# Altium PCB Therm_Expand_GND.PcbDoc
Units mil, origin at the board's own origin, x right, y up, seen from the top; angles counter-clockwise.
Board outline 3325 x 2597 mil, 2 copper layers (Top Layer, Bottom Layer); 44 components, 35 nets, 223 pads, 44 vias.
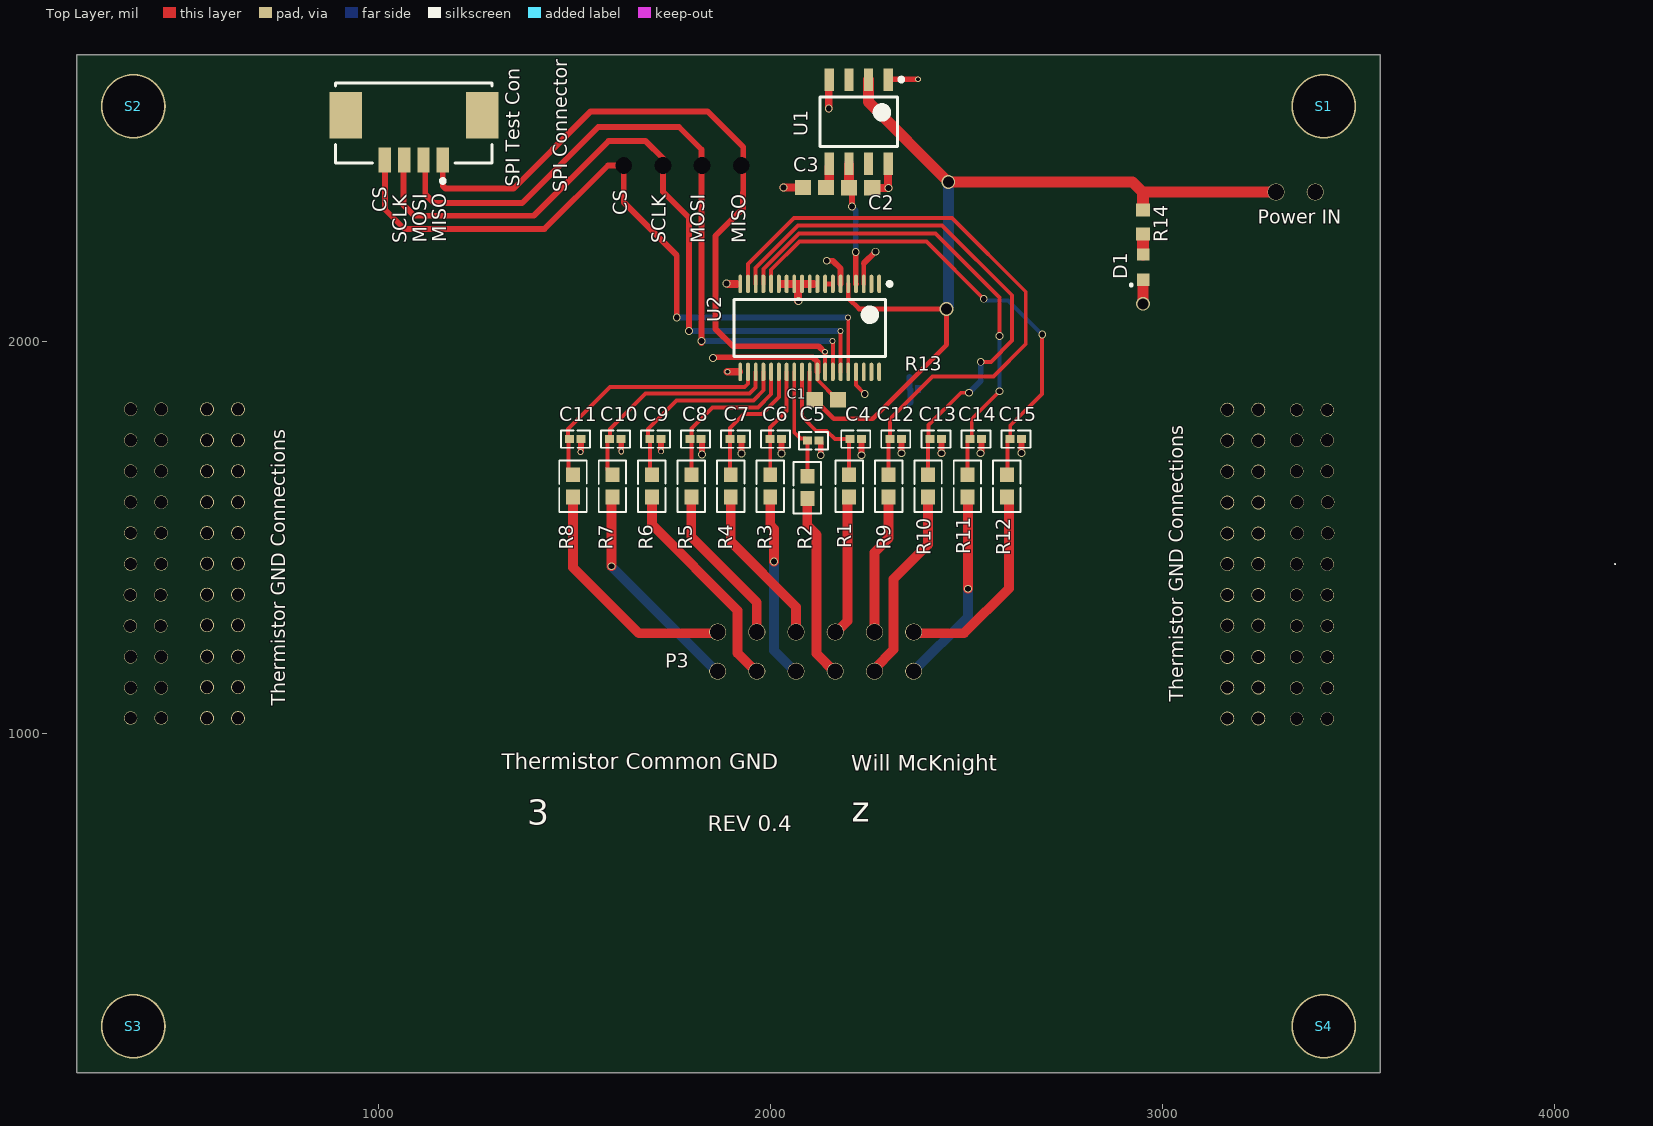
[diagram p0: Top Layer view]
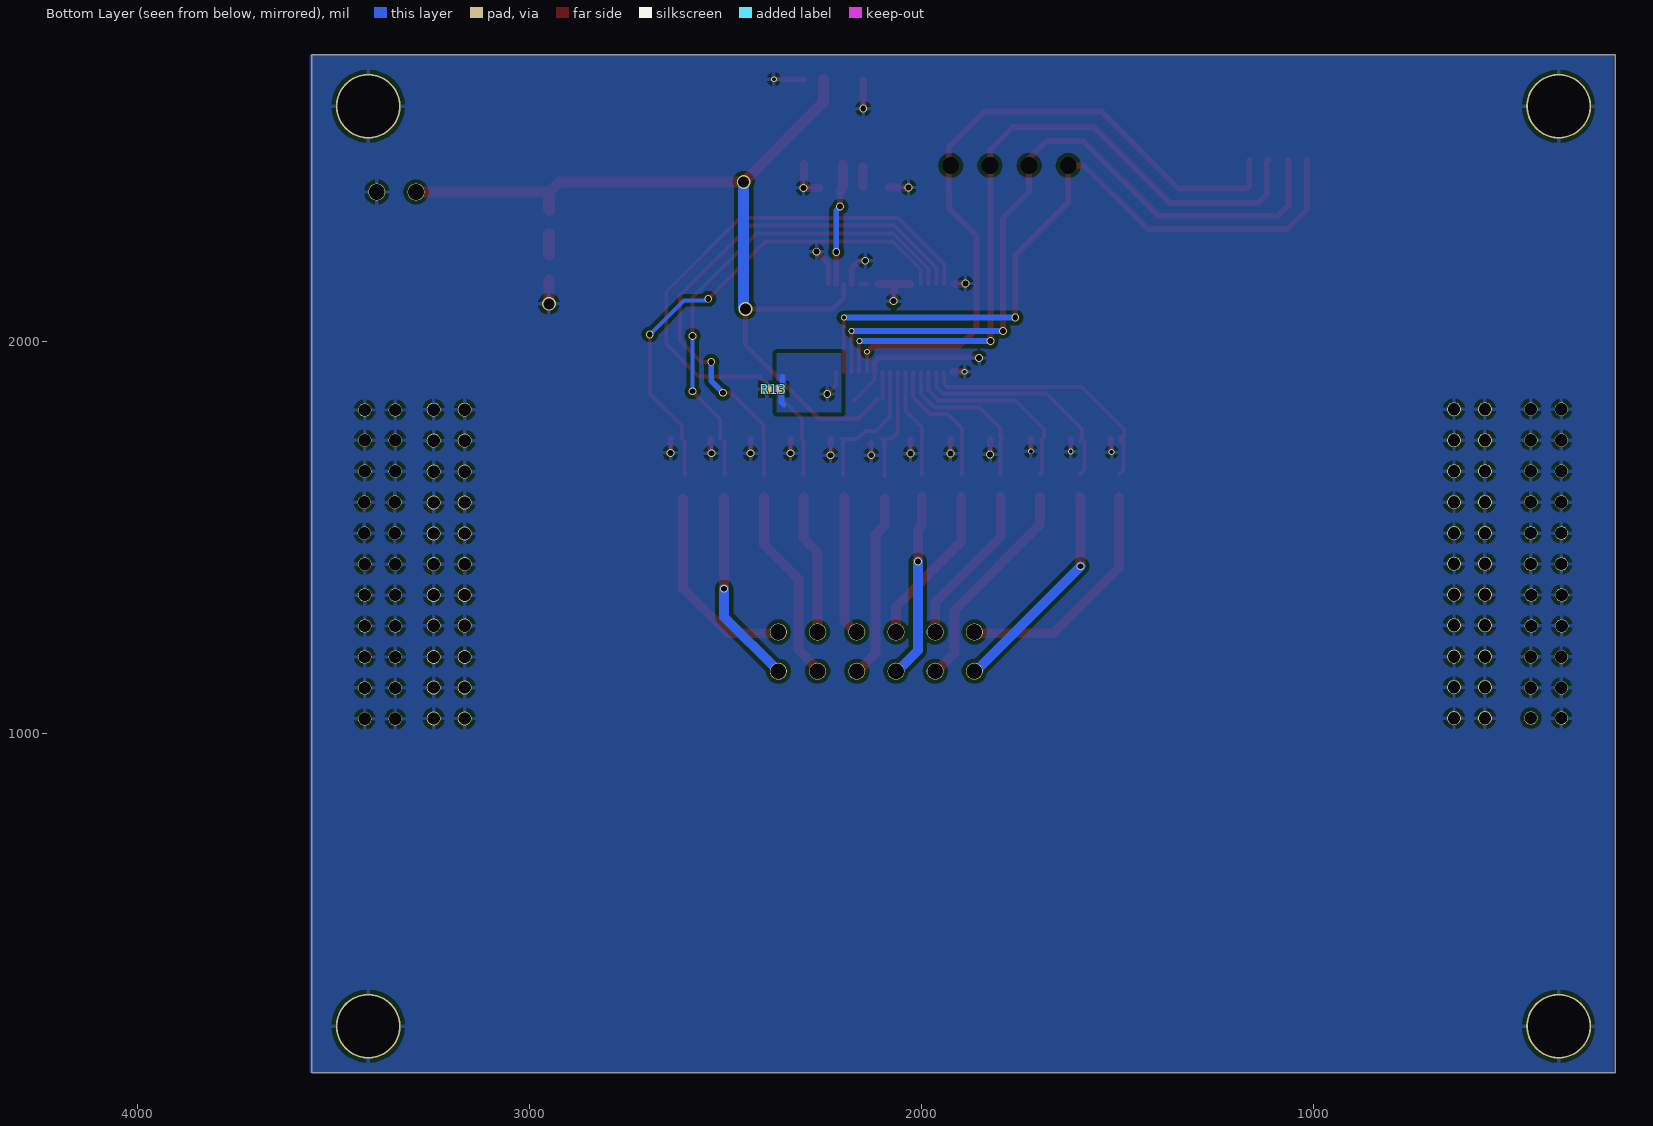
[diagram p1: Bottom Layer view, seen from below]
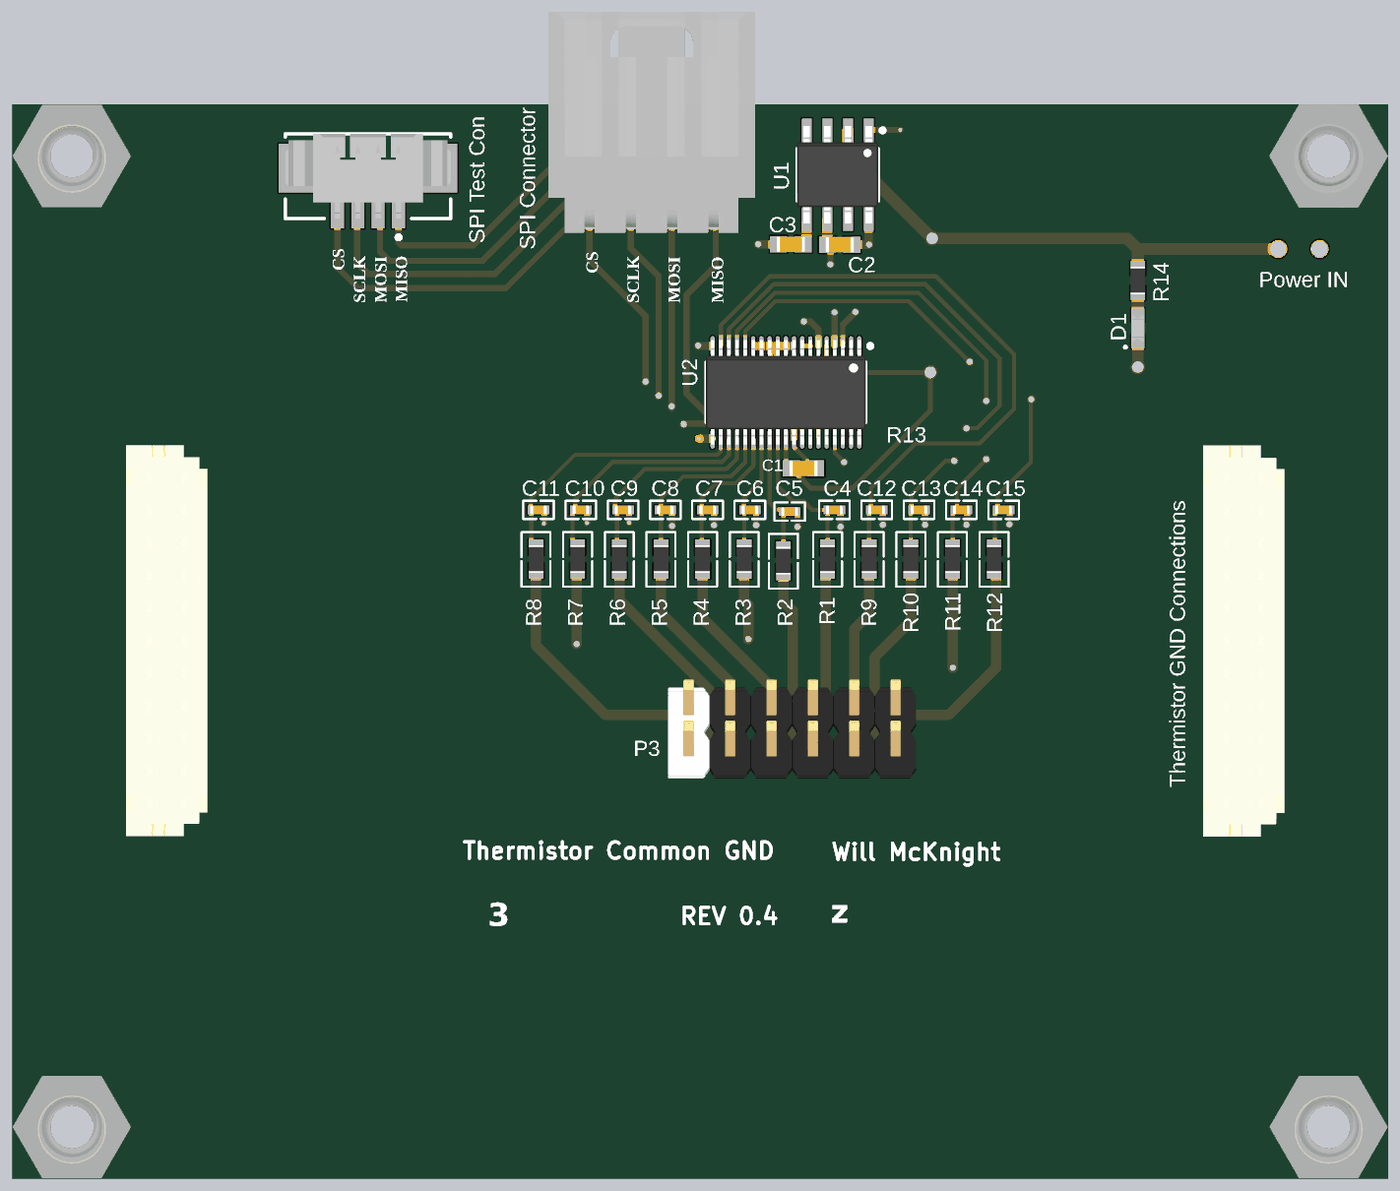
[diagram p2: 3D render of the assembled board from above, using the file's embedded part models]

## Layer stack, top to bottom
Top Solder: solder mask 0.4, Solder Resist, Dk 3.5
Top Layer: signal copper 1.4
Dielectric 1: dielectric 12.6, FR-4, Dk 4.8
Bottom Layer: signal copper 1.4
Bottom Solder: solder mask 0.4, Solder Resist, Dk 3.5

## Board outline
230,134 3555,134 3555,2731 230,2731

## Design rules (kind name [scope] priority, off if disabled: settings)
Clearance [All] p1: gap=10 ignorepadtopadclearanceinfootprint=TRUE except(0: Arc-Hole Track-Hole SMDPad-Hole THPad-Hole Via-Hole Fill-Hole Poly-Hole Region-Hole Text-Hole; 2: Track-Fill SMDPad-Fill THPad-Fill; 5: Arc-Arc Arc-Track Arc-SMDPad Track-Track Track-SMDPad Track-Via SMDPad-SMDPad Via-Via)
PolygonConnect PolygonConnect_1 [All] p1: connectstyle=Relief reliefconductorwidth=10 reliefentries=4 polygonreliefangle="90 Angle" airgapwidth=10
PolygonConnect [All] p2: thpad.connectstyle=Relief thpad.reliefconductorwidth=5 thpad.reliefentries=4 thpad.polygonreliefangle="45 Angle" thpad.airgapwidth=7 smdpad.connectstyle=Relief smdpad.reliefconductorwidth=10 smdpad.reliefentries=4 smdpad.polygonreliefangle="90 Angle" smdpad.airgapwidth=10 via.connectstyle=Relief via.reliefconductorwidth=10 via.reliefentries=4 via.polygonreliefangle="90 Angle" via.airgapwidth=10
RoutingVias [All] p1: holewidth=10 width=15 viastyle="Through Hole" minholewidth=10 minwidth=10 maxholewidth=28 maxwidth=50
ShortCircuit [All] p1 off: allowed=FALSE
SolderMaskExpansion [All] p1: expansion=4
UnRoutedNet [All] p1: checkbadconnections=TRUE
Width [All] p1: maxlimit=50 minlimit=6 preferedwidth=10 minimp=50.000000 maximp=50.000000 favimp=50.000000
28 further rules are at their usual default settings.

## Classes and differential pairs
component class 4X_22_GND_Pin_Connector: S1 S2 S3 S4
component class GND_PCB_Data_Conversion: "3.3V VREF IN" C1 C2 C3 C4 C5 C6 C7 C8 C9 C10 C11 C12 C13 C14 C15 P3 R1 R2 R3 R4 R5 R6 R7 R8 R9 R10 R11 R12 R13 U1

## Components (designator, comment, footprint, x,y, rotation, side; value= is the part's Value field where it differs from the comment)
C1 "0.1uF" "0.1uF Bypass Capacitor" 2142,1851 r180 top
C2 "0.1uF" "0.1uF Bypass Capacitor" 2229.61,2391.75 r180 top
C3 "0.1uF" "0.1uF Bypass Capacitor" 2111.61,2392.75 r180 top
C4 "150PF Charge Res Caps" "150PF Cap Charge Resevoir" 2216.89,1750.75 r180 top
C5 "150PF Charge Res Caps" "150PF Cap Charge Resevoir" 2108.71,1746.75 r180 top
C6 "150PF Charge Res Caps" "150PF Cap Charge Resevoir" 2012.52,1750.75 r180 top
C7 "150PF Charge Res Caps" "150PF Cap Charge Resevoir" 1910.34,1750.75 r180 top
C8 "150PF Charge Res Caps" "150PF Cap Charge Resevoir" 1808.16,1750.75 r180 top
C9 "150PF Charge Res Caps" "150PF Cap Charge Resevoir" 1705.98,1750.75 r180 top
C10 "150PF Charge Res Caps" "150PF Cap Charge Resevoir" 1603.8,1750.75 r180 top
C11 "150PF Charge Res Caps" "150PF Cap Charge Resevoir" 1501.61,1750.75 r180 top
C12 "150PF Charge Res Caps" "150PF Cap Charge Resevoir" 2319.07,1750.75 r180 top
C13 "150PF Charge Res Caps" "150PF Cap Charge Resevoir" 2421.25,1750.75 r180 top
C14 "150PF Charge Res Caps" "150PF Cap Charge Resevoir" 2523.43,1750.75 r180 top
C15 "150PF Charge Res Caps" "150PF Cap Charge Resevoir" 2625.61,1750.75 r180 top
D1 "LED" Green_SMD_LED 2886,1811 r90 top
P2 "22-Pin-Connector" "22-Pin Conenctor" -10142,-11980 r270 top
P3 "12 POS ADC Header" "12 POS Dual Header" 2364.61,1258.75 r180 top
P5 "22-Pin-Connector-Recepticle" "22 POS Connector Recepticle" 641,1039 r90 top
"Power IN" "2 Pos Power Header without 3D body" "2 Pos Power Header - duplicate" 3389.11,2381.29 r180 top (schematic designator P8)
R1 "75 Ohm Charge Resevoir Resistor" Chip2PinSM127P600-8N 2200.07,1631.75 r90 top
R2 "75 Ohm Charge Resevoir Resistor" Chip2PinSM127P600-8N 2093.43,1627.75 r90 top
R3 "75 Ohm Charge Resevoir Resistor" Chip2PinSM127P600-8N 1998.8,1631.75 r90 top
R4 "75 Ohm Charge Resevoir Resistor" Chip2PinSM127P600-8N 1898.16,1631.75 r90 top
R5 "75 Ohm Charge Resevoir Resistor" Chip2PinSM127P600-8N 1797.52,1631.75 r90 top
R6 "75 Ohm Charge Resevoir Resistor" Chip2PinSM127P600-8N 1696.89,1631.75 r90 top
R7 "75 Ohm Charge Resevoir Resistor" Chip2PinSM127P600-8N 1596.25,1631.75 r90 top
R8 "75 Ohm Charge Resevoir Resistor" Chip2PinSM127P600-8N 1495.61,1631.75 r90 top
R9 "75 Ohm Charge Resevoir Resistor" Chip2PinSM127P600-8N 2300.71,1631.75 r90 top
R10 "75 Ohm Charge Resevoir Resistor" Chip2PinSM127P600-8N 2401.34,1631.75 r90 top
R11 "75 Ohm Charge Resevoir Resistor" Chip2PinSM127P600-8N 2501.98,1631.75 r90 top
R12 "75 Ohm Charge Resevoir Resistor" Chip2PinSM127P600-8N 2602.61,1631.75 r90 top
R13 "0 Ohm Resistor" "0 OHM RESISTOR" 2394,1878 r180 top
R14 "Green" Green_LED_Resistor_90.9 2950,2305 r270 top
S1 "#6-32 Hex Standoff" "#6-32 GND Standoff" 3413,2602 r90 top
S2 "#6-32 Hex Standoff" "#6-32 GND Standoff" 376,2602 r90 top
S3 "#6-32 Hex Standoff" "#6-32 GND Standoff" 376,255 r90 top
S4 "#6-32 Hex Standoff" "#6-32 GND Standoff" 3413,255 r90 top
"SPI Connector" "2.54MM MUX SEL CON" "4POS 2.54MM HEADER MUX SEL" 1624,2524 r0 top
"SPI Test Con" "SPI Tets Connector" "SPI Testing Connector" 1090.61,2518.75 r180 top
"Thermistor GND Connections" "22-Pin-Connector" "22-Pin Conenctor" 13929,14844.19 r90 top (schematic designator P1)
"Thermistor GND Connections" "22-Pin-Connector-Recepticle" "22 POS Connector Recepticle" 3244,1038 r90 top (schematic designator P4)
U1 "8Pin_ADC_REF_V" SOIC127P600X175-8N 2224.61,2560.75 r270 top
U2 "12 Channel SAR ADC" "12 Channel SAR ADC" 2099.5,2034.55 r270 top locked

## Footprints (in the part's own frame and the unit in brackets; to place one, negate y for a bottom-side part, rotate by r counter-clockwise, add the part's x,y. Pads: shape width x height; smd on the part's side, far side on the other; paste and mask are expansions set on the pad)
"0 OHM RESISTOR" [mm]
  rect 0.6x0.6 smd far side: 1(0,0) 2(0.914,0)
  Bottom Layer region: 0.254,-0.279 0.66,-0.279 0.66,0.254 0.254,0.254
"0.1uF Bypass Capacitor" [mm] "Chip Capacitor, 2-Leads, Body 1.60x0.80mm, IPC Medium Density"
  rect 1.05x1 smd: 1(-0.75,0) 2(0.75,0)
  body extent -0.87,-0.48 0.87,0.48, height 0.9
"2 Pos Power Header - duplicate" [mm] "Without 3D body,"
  round 1.1 hole 1.02: 1(0,0) 2(2.54,0)
"4POS 2.54MM HEADER MUX SEL" [mm]
  round 1 hole 1.09: 1(0.025,-1.905) 2(2.565,-1.905) 3(5.105,-1.905) 4(7.645,-1.905)
  round 0.8 hole 1.09: 4(7.645,-1.905)
  body extent -2.51,-2.64 10.19,10.95, height 7.06
"12 Channel SAR ADC" [mm] "TSSOP, 38-Leads, Body 9.70x4.40mm, Pitch 0.50mm, IPC High Density"
  oval 1.2x0.25 smd: 1(-2.85,4.5) 2(-2.85,4) 3(-2.85,3.5) 4(-2.85,3) 5(-2.85,2.5) 6(-2.85,2) 7(-2.85,1.5) 8(-2.85,1) 9(-2.85,0.5) 10(-2.85,0) 11(-2.85,-0.5) 12(-2.85,-1) 13(-2.85,-1.5) 14(-2.85,-2) 15(-2.85,-2.5) 16(-2.85,-3) 17(-2.85,-3.5) 18(-2.85,-4) 19(-2.85,-4.5) 20(2.85,-4.5) 21(2.85,-4) 22(2.85,-3.5) 23(2.85,-3) 24(2.85,-2.5) 25(2.85,-2) 26(2.85,-1.5) 27(2.85,-1) 28(2.85,-0.5) 29(2.85,0) 30(2.85,0.5) 31(2.85,1) 32(2.85,1.5) 33(2.85,2) 34(2.85,2.5) 35(2.85,3) 36(2.85,3.5) 37(2.85,4) 38(2.85,4.5)
  silkscreen extent -2.97,-4.9 1.85,5.3, body extent -3.2,-4.9 3.2,4.9, height 1.2
"12 POS Dual Header" [mm] "Board to Board ADC Channel Header"
  round 1.1 hole 1.02: 1(0,0) 2(0,2.54) 3(2.54,2.54) 4(2.54,0) 5(5.08,0) 6(5.08,2.54) 7(7.62,2.54) 8(7.62,0) 9(10.16,0) 10(10.16,2.54) 11(12.7,2.54) 12(12.7,0)
  body extent -1.27,-3.18 13.97,4.7, height 20.46
"22 POS Connector Recepticle" [mm]
  round 0.9 hole 0.8: 1(0,0) 2(0,2.007) 3(2.007,2.007) 4(2.007,0) 5(3.988,0) 6(3.988,2.007) 7(6.02,2.007) 8(6.02,0) 9(8.001,0) 10(8.001,2.007) 11(10.008,2.007) 12(10.008,0) 13(11.989,0) 14(11.989,2.007) 15(13.995,2.007) 16(13.995,0) 17(16.002,0) 18(16.002,2.007) 19(18.009,2.007) 20(18.009,0) 21(20.015,0) 22(20.015,2.007)
  body extent -1.95,-1.53 22.05,3.47, height 5.8
"22-Pin Conenctor" [mil]
  round 34 hole 31.5: 1(-13017,13484) 2(-13017,13562) 3(-13096,13484) 4(-13096,13562) 5(-13175,13484) 6(-13175,13562) 7(-13254,13484) 8(-13254,13562) 9(-13333,13484) 10(-13333,13562) 11(-13412,13484) 12(-13412,13562) 13(-13491,13485) 14(-13491,13563) 15(-13570,13485) 16(-13570,13563) 17(-13649,13484) 18(-13649,13562) 19(-13728,13484) 20(-13728,13562) 22(-13805,13562) 51(-13805,13484)
  body extent -13883,13472 -12939,13866, height 199
"150PF Cap Charge Resevoir" [mm] "Charge Res Caps for ADC Input Channels"
  rect 0.58x0.52 smd: 1(-0.37,0) 2(0.37,0)
  silkscreen extent -0.94,-0.56 0.94,0.56, body extent -0.53,-0.28 0.53,0.28, height 0.55
"#6-32 GND Standoff" [mm] "Hex standoff for Thermistor GND PCB"
  round 4.2 hole 4: 1(-0.051,0.051)
  body extent -3.07,-3.61 3.28,3.71, height 9.53
Chip2PinSM127P600-8N [mm] "75 Ohm Charge Resevoir Resistor"
  rect 0.95x0.9 smd: 1(-0.725,0) 2(0.725,0)
  silkscreen extent -1.7,-0.89 1.65,0.89, body extent -0.85,-0.45 0.85,0.45, height 0.55
Green_LED_Resistor_90.9 [mm]
  rect 0.85x0.9 smd: 1(-0.775,0) 2(0.775,0)
  body extent -0.85,-0.45 0.85,0.45, height 0.55
Green_SMD_LED [mil]
  rect 31.5x31.5 smd: 1(346,-64) 2(411,-64)
  silkscreen extent 332,-35 334,-33, body extent 346,-79 410,-48, height 28
SOIC127P600X175-8N [mm] "SOIC, 8-Leads, Body 4.90x3.90mm, Pitch 1.27mm, IPC Medium Density"
  rect 1.45x0.6 smd: 1(-2.725,1.905) 2(-2.725,0.635) 3(-2.725,-0.635) 4(-2.725,-1.905) 5(2.725,-1.905) 6(2.725,-0.635) 7(2.725,0.635) 8(2.725,1.905)
  silkscreen extent -2.85,-2.5 1.6,2.88, body extent -3,-2.5 3,2.5, height 1.75
"SPI Testing Connector" [mm]
  rect 0.8x1.6 smd: 1(-1.85,1.425) 2(-0.6,1.425) 3(0.65,1.425) 4(1.9,1.425)
  rect 2.1x3 smd: MP1(-4.4,-1.475) MP2(4.45,-1.475)
  silkscreen extent -5.05,-3.58 5.1,2.9, body extent -5.05,-3.58 5.1,1.62, height 3.4

## Part data
C1 C2 C3: library part "0.1uF Cap", "0.1uF Bypass Cap", Case/Package=0603, Case Code (Metric)=1608, Dielectric=X7R, Dielectric Material=Ceramic, Manufacturer=KEMET, Manufacturer Part Number=C0603C104K9RACTU, Max Operating Temperature=125°C, Min Operating Temperature=-55°C, Package Quantity=4000, Supplier Part Number 1=399-15351-1-ND, Tolerance=10%, Voltage Rating=6.3V, Case Code (Imperial)=0603, ComponentLink1Description=https://datasheet.ciiva.com/13371/kem-c1002-x7r-smd-357932-13371879.pdf?src-supplier=Mouser, ComponentLink1URL=https://datasheet.ciiva.com/13371/kem-c1002-x7r-smd-357932-13371879.pdf?src-supplier=Mouser, Dissipation Factor=5%, Height=0.8mm, Length=1.6mm, Mount="Surface Mount", Packaging="Tape and Reel", Pricing 1="1=0.19000, 10=0.13800, 100=0.06480, 500=0.04546, 1000=0.03763 (USD)", RoHS=Yes, Stock 1=758, Supplier 1=Digi-Key, Termination=SMD/SMT, Thickness=0.034inch, Voltage Rating (DC)=6.3V, Width=0.8mm
C4 C5 C6 C7 C8 C9 C10 C11 C12 C13 C14 C15: "Charge Res Caps for ADC input channels", Capacitance=150pF, Case/Package=0402, Dielectric=C0G, Dielectric Material=Ceramic, Manufacturer=KEMET, Manufacturer Part Number=C0402C151J3GACTU, Max Operating Temperature=125°C, Min Operating Temperature=-55°C, Package Quantity=10000, Supplier Part Number 1=80-C0402C151J3G, Tolerance=5%, Voltage Rating=25V, ComponentLink1Description=http://components.arrow.com/part/dataview/46126249S9911696N7429?src-supplier=Arrow, ComponentLink1URL=http://components.arrow.com/part/dataview/46126249S9911696N7429?src-supplier=Arrow, ComponentLink2Description=http://www.kemet.com/docfinder?Partnumber=C0402C151J3GACTU&src-supplier=Digi-Key, ComponentLink2URL=http://www.kemet.com/docfinder?Partnumber=C0402C151J3GACTU&src-supplier=Digi-Key, Depth=0.5mm, Lead Free="Lead Free", Length=0.039inch, Mount="Surface Mount", Packaging="Tape and Reel", Pricing 1="1=0.39000, 10=0.23200, 50=0.23200, 100=0.14100, 500=0.12800, 1000=0.11500, 2000=0.09600, 10000=0.07600 (USD)", Radiation Hardening=No, RoHS=Yes, Stock 1=1976, Supplier 1=Mouser, Thickness=0.022inch, Voltage Rating (DC)=25V, Width=0.02inch
D1: library part GREEN_LED, Case/Package=0603, Case Code (Metric)=1608, Color=Green, Forward Current=20mA, Forward Voltage=2V, Lens Color=Colorless,Clear, Manufacturer=Dialight, Manufacturer Part Number=5988070107F, Max Operating Temperature=100°C, Min Operating Temperature=-30°C, Package Quantity=4000, Power Dissipation=60mW, Reverse Voltage=5V, Supplier Part Number 1=350-2035-1-ND, Case Code (Imperial)=0603, ComponentLink1Description=http://www.mouser.com/ds/2/109/SMT_selector_guide-267443.pdf?src-supplier=Mouser, ComponentLink1URL=http://www.mouser.com/ds/2/109/SMT_selector_guide-267443.pdf?src-supplier=Mouser, ComponentLink2Description=http://uk.rs-online.com/webdocs/0ae2/0900766b80ae2975.pdf?src-supplier=RSComponents, ComponentLink2URL=http://uk.rs-online.com/webdocs/0ae2/0900766b80ae2975.pdf?src-supplier=RSComponents, ComponentLink3Description=http://www.farnell.com/datasheets/1720200.pdf?src-supplier=Element14, ComponentLink3URL=http://www.farnell.com/datasheets/1720200.pdf?src-supplier=Element14, ComponentLink4Description=https://media.digikey.com/pdf/Data%20Sheets/Dialight%20PDFs/598_Series_0603_Pkg.pdf?src-supplier=Digi-Key, ComponentLink4URL=https://media.digikey.com/pdf/Data%20Sheets/Dialight%20PDFs/598_Series_0603_Pkg.pdf?src-supplier=Digi-Key, ComponentLink5Description=http://www.farnell.com/datasheets/1484480.pdf?src-supplier=Element14, ComponentLink5URL=http://www.farnell.com/datasheets/1484480.pdf?src-supplier=Element14, ComponentLink6Description=https://www.alliedelec.com/m/d/745256ca487aea7b70ea31e2d673d5bb.pdf?src-supplier=Allied+Electronics, ComponentLink6URL=https://www.alliedelec.com/m/d/745256ca487aea7b70ea31e2d673d5bb.pdf?src-supplier=Allied+Electronics, ComponentLink7Description=http://www.onlinecomponents.com/productFiles/mf-DIA/mdei5980603.pdf?src-supplier=Onlinecomponents.com, ComponentLink7URL=http://www.onlinecomponents.com/productFiles/mf-DIA/mdei5980603.pdf?src-supplier=Onlinecomponents.com, ComponentLink8Description=https://www.verical.com/server-webapp/html/getDatasheet?partID=146438&src-supplier=Verical, ComponentLink8URL=https://www.verical.com/server-webapp/html/getDatasheet?partID=146438&src-supplier=Verical, ComponentLink9Description=http://www.dialight.com/Assets/Brochures_And_Catalogs/Indication/SMT_selector_guide.pdf?src-supplier=Future+Electronics, ComponentLink9URL=http://www.dialight.com/Assets/Brochures_And_Catalogs/Indication/SMT_selector_guide.pdf?src-supplier=Future+Electronics, Depth=0.8mm, Dominant Wavelength=568nm, Height=0.7mm, Illumination Color=Green, Lead Free="Lead Free", Length=1.6mm, Lens Size=0.8mm, Lens Style=Flat,Rectangular,Diffused,Colorless,Clear, Lens Transparency=Clear, Luminous Intensity=20mcd, Mount="Surface Mount", Number of Elements=1, Number of LEDs=1, Number of Pins=2, Packaging="Tape and Reel", Pricing 1="1=0.46, 10=0.33, 25=0.2528, 100=0.1648, 250=0.1209, 500=0.1026, 1000=0.0843 (USD)", Radiation Hardening=No, REACH SVHC="No SVHC", Stock 1=228546, Supplier 1=Digi-Key, Test Current=20mA, Viewing Angle=140°, Wavelength=570nm, Width=0.8mm
P2 "Thermistor GND Connections": Color=Black, Contact Resistance=30mR, Current Rating=2A, Manufacturer=Hirose, Manufacturer Part Number=DF11-22DP-2DS(24), Max Operating Temperature=85°C, Min Operating Temperature=-30°C, Package Quantity=20, Supplier Part Number 1=H10253-ND, Voltage Rating=250V, ComponentLink1Description=http://docs-usa.electrocomponents.com/techlib:/itc_doclist_US.htm?stockno=6888963&src-supplier=Allied+Electronics, ComponentLink1URL=http://docs-usa.electrocomponents.com/techlib:/itc_doclist_US.htm?stockno=6888963&src-supplier=Allied+Electronics, ComponentLink2Description=https://www.verical.com/server-webapp/html/getDatasheet?partID=456315&src-supplier=Verical, ComponentLink2URL=https://www.verical.com/server-webapp/html/getDatasheet?partID=456315&src-supplier=Verical, ComponentLink3Description=http://www.hirose.co.jp/cataloge_hp/en_DF11_20130411.pdf?src-supplier=Future+Electronics, ComponentLink3URL=http://www.hirose.co.jp/cataloge_hp/en_DF11_20130411.pdf?src-supplier=Future+Electronics, ComponentLink4Description=http://www.farnell.com/datasheets/91550.pdf?src-supplier=Element14, ComponentLink4URL=http://www.farnell.com/datasheets/91550.pdf?src-supplier=Element14, ComponentLink5Description=http://www.mouser.com/ds/2/185/DF11_catalog-1064296.pdf?src-supplier=Mouser, ComponentLink5URL=http://www.mouser.com/ds/2/185/DF11_catalog-1064296.pdf?src-supplier=Mouser, ComponentLink6Description=http://documents.rs-components.com/techlib://itc_doclist_GB.htm?stockno=6056598&src-supplier=RSComponents, ComponentLink6URL=http://documents.rs-components.com/techlib://itc_doclist_GB.htm?stockno=6056598&src-supplier=RSComponents, Connector Type="Male Pin", Contact Material="Brass,Copper Alloy,Tin", Contact Mating Length=0.118inch, Contact Plating=Tin, Depth=10mm, Fastening Type=Detent, Gender=Male, Height=5mm, Housing Color=Black, Housing Material=Polyamide, Lead Free="Lead Free", Length=24mm, Max Current Rating=2A, Mount="Through Hole", Number of Contacts=22, Number of Positions=22, Number of Rows=2, Orientation="Right Angle", Packaging=Rail/Tube, Pitch=2mm, Pricing 1="1=1.19, 20=1.0455, 100=0.902, 500=0.738, 1000=0.656 (USD)", Radiation Hardening=No, Row Spacing=0.079inch, Stock 1=536, Supplier 1=Digi-Key, System=Connector, Termination=Solder
P3: "Interboard connector for thermistors connecting to ADC", Color=Black, Manufacturer=3M, Manufacturer Part Number=929715-06-06-EU, Package Quantity=500, Supplier Part Number 1=3M156375-12-ND, ComponentLink1Description=http://www.mouser.com/ds/2/1/ts0769-35914.pdf?src-supplier=Mouser, ComponentLink1URL=http://www.mouser.com/ds/2/1/ts0769-35914.pdf?src-supplier=Mouser, ComponentLink2Description=http://components.arrow.com/part/dataview/42715320S8912076N3321?src-supplier=Arrow, ComponentLink2URL=http://components.arrow.com/part/dataview/42715320S8912076N3321?src-supplier=Arrow, ComponentLink3Description=http://multimedia.3m.com/mws/mediawebserver?66666UuZjcFSLXTtmXME5x46EVuQEcuZgVs6EVs6E666666--?src-supplier=Digi-Key, ComponentLink3URL=http://multimedia.3m.com/mws/mediawebserver?66666UuZjcFSLXTtmXME5x46EVuQEcuZgVs6EVs6E666666--?src-supplier=Digi-Key, Connector Type="Male Pin", Contact Mating Length=0.318inch, Contact Plating=Gold, Gender=Male, Mount="Through Hole", Number of Positions=12, Number of Rows=2, Packaging=Bulk, Pitch=0.1inch, Pricing 1="1=1.86000, 10=1.69000, 25=1.58600, 50=1.51720, 100=1.44820, 250=1.31024, 500=1.20680 (USD)", RoHS=Yes, Row Spacing=0.1inch, Stock 1=0, Supplier 1=Digi-Key, Termination=Solder
P5 "Thermistor GND Connections": Color=Black, Contact Resistance=30mR, Current Rating=2A, Flammability Rating="UL94 V-0", Insulation Resistance=1GR, Manufacturer=Hirose, Manufacturer Part Number=DF11-22DS-2DSA(05), Package Quantity=100, Supplier Part Number 1=H10177-ND, Voltage Rating (AC)=30V, ComponentLink1Description=https://datasheet.ciiva.com/11752/0900766b80d975f3-11752361.pdf?src-supplier=RSComponents, ComponentLink1URL=https://datasheet.ciiva.com/11752/0900766b80d975f3-11752361.pdf?src-supplier=RSComponents, ComponentLink2Description=https://datasheet.ciiva.com/14122/df11serie-eng-tds-14122182.pdf?src-supplier=Distrelec, ComponentLink2URL=https://datasheet.ciiva.com/14122/df11serie-eng-tds-14122182.pdf?src-supplier=Distrelec, ComponentLink3Description=https://datasheet.ciiva.com/5155/en-df11-20130411-258217-5155093.pdf?src-supplier=Mouser, ComponentLink3URL=https://datasheet.ciiva.com/5155/en-df11-20130411-258217-5155093.pdf?src-supplier=Mouser, Connector Type=Receptacle, Contact Gender=Female, Contact Material=Copper, Contact Plating=Tin, Gender=Receptacle, Housing Color=Black, Housing Material=Polyamide, Lead Free="Lead Free", Lead Pitch=2mm, Mating Cycles=30, Mount="Through Hole", Number of Contacts=22, Number of Positions=22, Number of Rows=2, Orientation=Straight, Packaging=Bulk, Pitch=2mm, Pricing 1="1=1.40000, 10=1.27400, 100=1.09200, 500=0.91000, 1000=0.78000 (USD)", REACH SVHC="No SVHC", RoHS=Yes, Row Spacing=0.079inch, Stock 1=843, Supplier 1=Digi-Key, System=Connector, Termination="Through Hole"
"Power IN": "No supplier part for this schematic symbol, only here to create board to board holes for the power header"
R1 R2 R3 R4 R5 R6 R7 R8 R9 R10 R11 R12: Case/Package=0603, Case Code (Metric)=1608, Manufacturer=Rohm, Manufacturer Part Number=KTR03EZPF75R0, Max Operating Temperature=155°C, Max Power Dissipation=100mW, Min Operating Temperature=-55°C, Package Quantity=1, Resistance=75R, Supplier Part Number 1=RHM75AYCT-ND, Temperature Coefficient=100ppm/°C, Tolerance=1%, Case Code (Imperial)=0603, ComponentLink1Description=https://datasheet.ciiva.com/14930/ktr-14930245.pdf?src-supplier=Digi-Key, ComponentLink1URL=https://datasheet.ciiva.com/14930/ktr-14930245.pdf?src-supplier=Digi-Key, ComponentLink2Description=https://datasheet.ciiva.com/14924/ktr-14924923.pdf?src-supplier=Digi-Key, ComponentLink2URL=https://datasheet.ciiva.com/14924/ktr-14924923.pdf?src-supplier=Digi-Key, ComponentLink3Description=https://datasheet.ciiva.com/14928/ktr-14928475.pdf?src-supplier=Digi-Key, ComponentLink3URL=https://datasheet.ciiva.com/14928/ktr-14928475.pdf?src-supplier=Digi-Key, Composition="Thick Film", Features="Automotive AEC-Q200", Height=0.022inch, Length=0.063inch, Number of Terminations=2, Packaging="Cut Tape", Pricing 1="1=0.15000, 10=0.13500, 100=0.05200, 1000=0.02287, 2500=0.01975 (USD)", RoHS=Yes, Stock 1=9052, Supplier 1=Digi-Key, Width=0.031inch
R13: "0 Ohm Resistor for connecting polygon pours"
R14: library part Green_LED_Res, Case/Package=0201, Case Code (Metric)=0603, Manufacturer=Panasonic, Manufacturer Part Number=ERJ-1GNF90R9C, Max Operating Temperature=125°C, Max Power Dissipation=50mW, Min Operating Temperature=-55°C, Package Quantity=15000, Resistance=90.9R, Supplier Part Number 1=311-90.9HRCT-ND, Temperature Coefficient=200ppm/°C, Tolerance=1%, Voltage Rating=25V, Voltage Rating (DC)=50V, Case Code (Imperial)=0201, ComponentLink1Description=https://datasheet.ciiva.com/15189/getdatasheetpartid-326528-15189836.pdf?src-supplier=Verical, ComponentLink1URL=https://datasheet.ciiva.com/15189/getdatasheetpartid-326528-15189836.pdf?src-supplier=Verical, ComponentLink2Description=https://datasheet.ciiva.com/12558/rc0603-272842-12558285.pdf?src-supplier=Mouser, ComponentLink2URL=https://datasheet.ciiva.com/12558/rc0603-272842-12558285.pdf?src-supplier=Mouser, Composition="Thick Film", Contact Plating=Tin,Matte, Depth=0.8mm, Height=0.01inch, Lead Free="Lead Free", Length=0.024inch, Military Standard=Not, Mount="Surface Mount", Number of Terminations=2, Packaging="Tape and Reel", Power Rating=50mW, Pricing 1="1=0.10000, 10=0.02400, 100=0.00970, 1000=0.00437, 2500=0.00379 (USD)", Radiation Hardening=No, RoHS=Yes, Stock 1=401780, Supplier 1=Digi-Key, Termination=SMD/SMT, Width=0.3mm
S1 S2 S3 S4: "Hex standoff for Thermistor GND Board", Case/Package=Aluminum, Manufacturer=RAF, Manufacturer Part Number=2104-632-AL, Supplier Part Number 1=1772-1401-ND, ComponentLink1Description=https://datasheet.ciiva.com/18425/70006493-18425850.pdf?src-supplier=Allied+Electronics, ComponentLink1URL=https://datasheet.ciiva.com/18425/70006493-18425850.pdf?src-supplier=Allied+Electronics, ComponentLink2Description=https://datasheet.ciiva.com/30059/2101-1032-b-5-30059595.pdf?src-supplier=Onlinecomponents.com, ComponentLink2URL=https://datasheet.ciiva.com/30059/2101-1032-b-5-30059595.pdf?src-supplier=Onlinecomponents.com, Gender="Female to Female", Length=0.5inch, Material=Aluminium, Pricing 1="1=0.26000, 25=0.17400, 100=0.14820, 250=0.14080, 500=0.13338, 1000=0.12597 (USD)", RoHS=Yes, Shape=Hex, Stock 1=3884, Supplier 1=Digi-Key
"SPI Connector": "SPI Connector", Color=Black, Contact Resistance=30mR, Current Rating=3A, Flammability Rating="UL94 V-0", Insulation Resistance=1GR, Manufacturer=Molex, Manufacturer Part Number=0705530108, Max Operating Temperature=105°C, Min Operating Temperature=-40°C, Package Quantity=1680, Supplier Part Number 1=WM4155-ND, Voltage Rating=250V, ComponentLink1Description=https://www.molex.com/pdm_docs/ps/PS-70400.pdf?src-supplier=Digi-Key, ComponentLink1URL=https://www.molex.com/pdm_docs/ps/PS-70400.pdf?src-supplier=Digi-Key, ComponentLink2Description=http://www.molex.com/webdocs/datasheets/pdf/en-us/0705530108_PCB_HEADERS.pdf?src-supplier=Avnet+Asia, ComponentLink2URL=http://www.molex.com/webdocs/datasheets/pdf/en-us/0705530108_PCB_HEADERS.pdf?src-supplier=Avnet+Asia, ComponentLink3Description=http://www.farnell.com/datasheets/2027073.pdf?src-supplier=Element14, ComponentLink3URL=http://www.farnell.com/datasheets/2027073.pdf?src-supplier=Element14, ComponentLink4Description=http://www.molex.com/webdocs/datasheets/pdf/en-us/0705530108_PCB_HEADERS.pdf?src-supplier=Avnet, ComponentLink4URL=http://www.molex.com/webdocs/datasheets/pdf/en-us/0705530108_PCB_HEADERS.pdf?src-supplier=Avnet, ComponentLink5Description=http://www.mouser.com/ds/2/276/0705530108_PCB_HEADERS-172949.pdf?src-supplier=Mouser, ComponentLink5URL=http://www.mouser.com/ds/2/276/0705530108_PCB_HEADERS-172949.pdf?src-supplier=Mouser, Connector Type="Male Pin", Contact Material=Bronze, Contact Mating Length=0.24inch, Contact Plating=Gold, Depth=13.59mm, ELV=Compliant, Fastening Type=Latch, Gender=Male, Glow Wire Compliant=Non-compliant, Housing Color=Black, Housing Material=Polyester, Length=12.71mm, Material=Brass, Mount="Through Hole", Number of Circuits=4, Number of Contacts=4, Number of Positions=4, Number of Rows=1, Orientation="Right Angle", Packaging=Rail/Tube, Pitch=0.1inch, Pricing 1="1=2.03, 10=1.838, 100=1.575, 500=1.3125, 1680=1.0875, 5040=0.9975, 10080=0.975 (USD)", Radiation Hardening=No, REACH SVHC=Unknown, Stock 1=1281, Supplier 1=Digi-Key, Termination=Solder, Voltage Rating (DC)=250V
"SPI Test Con": "1.25mm Pitch PicoBlade™ Header, Surface Mount, Right Angle, 4 Circuits", Color=Beige, Contact Resistance=20mR, Current Rating=1A, Flammability Rating="UL94 V-0", Insulation Resistance=100MR, Manufacturer=Molex, Manufacturer Part Number=53261-0471, Max Operating Temperature=85°C, Min Operating Temperature=-40°C, Package Quantity=1000, Supplier Part Number 1=WM7622CT-ND, Voltage Rating=125V, ComponentLink1Description=https://datasheet.ciiva.com/5153/0532610471-pcb-headers-170942-5153858.pdf?src-supplier=Mouser, ComponentLink1URL=https://datasheet.ciiva.com/5153/0532610471-pcb-headers-170942-5153858.pdf?src-supplier=Mouser, ComponentLink2Description=https://datasheet.ciiva.com/11750/0900766b8078fc7e-11750771.pdf?src-supplier=RSComponents, ComponentLink2URL=https://datasheet.ciiva.com/11750/0900766b8078fc7e-11750771.pdf?src-supplier=RSComponents, ComponentLink3Description=https://datasheet.ciiva.com/30219/60210532610471-pcb-headers-30219733.pdf?src-supplier=Onlinecomponents.com, ComponentLink3URL=https://datasheet.ciiva.com/30219/60210532610471-pcb-headers-30219733.pdf?src-supplier=Onlinecomponents.com, ComponentLink4Description=https://datasheet.ciiva.com/7167/1626149-7167499.pdf?src-supplier=Newark, ComponentLink4URL=https://datasheet.ciiva.com/7167/1626149-7167499.pdf?src-supplier=Newark, ComponentLink5Description=https://datasheet.ciiva.com/34303/1932555-34303343.pdf?src-supplier=Jameco, ComponentLink5URL=https://datasheet.ciiva.com/34303/1932555-34303343.pdf?src-supplier=Jameco, ComponentLink6Description=https://datasheet.ciiva.com/7844/1867384-7844038.pdf?src-supplier=Element14, ComponentLink6URL=https://datasheet.ciiva.com/7844/1867384-7844038.pdf?src-supplier=Element14, ComponentLink7Description=https://datasheet.ciiva.com/16658/0532610471-pcb-headers-16658425.pdf?src-supplier=Avnet+Europe, ComponentLink7URL=https://datasheet.ciiva.com/16658/0532610471-pcb-headers-16658425.pdf?src-supplier=Avnet+Europe, ComponentLink8Description=https://datasheet.ciiva.com/10088/0532610471-pcb-headers-10088986.pdf?src-supplier=Avnet, ComponentLink8URL=https://datasheet.ciiva.com/10088/0532610471-pcb-headers-10088986.pdf?src-supplier=Avnet, ComponentLink9Description=https://datasheet.ciiva.com/18448/70091119-18448940.pdf?src-supplier=Allied+Electronics, ComponentLink9URL=https://datasheet.ciiva.com/18448/70091119-18448940.pdf?src-supplier=Allied+Electronics, Contact Material=Bronze, Contact Plating=Tin, Gender=Male, Glow Wire Compliant=Non-compliant, Housing Material=Thermoplastic, Lead Free="Lead Free", Lead Pitch=1.25mm, Mount="Surface Mount", Number of Circuits=4, Number of Contacts=4, Number of Positions=4, Number of Rows=1, Orientation="Right Angle", Packaging="Tape and Reel", Pitch=1.25mm, Pricing 1="1=1.24000, 10=1.08900, 100=0.93970, 500=0.76884 (USD)", Radiation Hardening=No, REACH SVHC=Unknown, RoHS=Yes, Stock 1=20955, Supplier 1=Digi-Key, Termination=SMD/SMT, Voltage Rating (AC)=125V, Voltage Rating (DC)=125V, Working Voltage=125V
U1: Case/Package=D, Manufacturer="Texas Instruments", Manufacturer Part Number=REF5025AQDRQ1, Max Input Voltage=18V, Max Operating Temperature=125°C, Max Output Current=10mA, Max Output Voltage=2.5V, Min Input Voltage=2.7V, Min Operating Temperature=-40°C, Nominal Supply Current=800uA, Operating Supply Current=1.2mA, Package Quantity=1, Supplier Part Number 1=296-27911-1-ND, Temperature Coefficient=3ppm/°C, Tolerance=0.1%, ComponentLink1Description=http://www.ti.com/lit/ds/symlink/ref5025a-q1.pdf, ComponentLink1URL=http://www.ti.com/lit/ds/symlink/ref5025a-q1.pdf, ComponentLink2Description=http://www.ti.com/lit/ds/symlink/ref5020a-q1.pdf?src-supplier=Digi-Key, ComponentLink2URL=http://www.ti.com/lit/ds/symlink/ref5020a-q1.pdf?src-supplier=Digi-Key, ComponentLink3Description=http://www.ti.com/lit/ds/symlink/ref5030a-q1.pdf?src-supplier=Digi-Key, ComponentLink3URL=http://www.ti.com/lit/ds/symlink/ref5030a-q1.pdf?src-supplier=Digi-Key, Lead Free="Lead Free", Min Output Voltage=2.5V, Number of Channels=1, Number of Pins=8, Output Current=10mA, Output Type=Fixed, Output Voltage=2.5V, Packaging="Tape and Reel", Pricing 1="1=3.54, 10=3.182, 100=2.607, 500=2.2193, 1000=1.8717 (USD)", Quiescent Current=800uA, Radiation Hardening=No, Reference Type=Series, Stock 1=16802, Supplier 1=Digi-Key, Weight=0.002677oz
U2: "12 Bit SAR ADC", Case/Package=TSSOP, Manufacturer="Texas Instruments", Manufacturer Part Number=ADS7952SDBT, Max Operating Temperature=125°C, Max Supply Voltage=5.25V, Min Operating Temperature=-40°C, Min Supply Voltage=2.7V, Nominal Supply Current=2.3mA, Operating Supply Voltage=3.3V, Package Quantity=50, Power Consumption=11.5mW, Power Dissipation=14.5mW, Supplier Part Number 1=296-23503-5-ND, ComponentLink1Description=https://datasheet.ciiva.com/41460/001186285-da-01-en-ic-adc-12bit-1m-ads7952sdbt-tssop-38-tid-41460243.pdf?src-supplier=Conrad, ComponentLink1URL=https://datasheet.ciiva.com/41460/001186285-da-01-en-ic-adc-12bit-1m-ads7952sdbt-tssop-38-tid-41460243.pdf?src-supplier=Conrad, ComponentLink2Description=https://datasheet.ciiva.com/14258/ads7961-14258981.pdf?src-supplier=Avnet, ComponentLink2URL=https://datasheet.ciiva.com/14258/ads7961-14258981.pdf?src-supplier=Avnet, ComponentLink3Description=https://datasheet.ciiva.com/1263/ads7950-1263926.pdf?src-supplier=Digi-Key, ComponentLink3URL=https://datasheet.ciiva.com/1263/ads7950-1263926.pdf?src-supplier=Digi-Key, Contact Plating=Gold, Conversion Rate=1MS/s, Full Scale Error=2LSB, Integral Nonlinearity (INL)=1.5LSB, Interface=SPI, Lead Free="Lead Free", Mount="Surface Mount", Number of A/D Converters=1, Number of Analog Inputs=12, Number of Bits=12, Number of Channels=12, Number of Converters=1, Number of Elements=1, Number of Inputs=12, Number of Pins=38, Packaging=Rail/Tube, Polarity=Unipolar, Pricing 1="1=9.30000, 10=8.40000, 50=8.00940, 100=6.95450, 500=6.05586, 1000=5.27445 (USD)", Radiation Hardening=No, REACH SVHC="No SVHC", Resolution=12b, RoHS=Yes, Sampling Rate=1MS/s, Signal to Noise Ratio (SNR)=71.7dB, Stock 1=1697, Supplier 1=Digi-Key, Supply Type=Analog

## Via types
v1: diameter 20, hole 15, Top Layer to Bottom Layer, tented top, 32 vias
v2: diameter 15, hole 10, Top Layer to Bottom Layer, tented top, 7 vias
v3: diameter 35, hole 28, Top Layer to Bottom Layer, tented top, 3 vias
v4: diameter 15, hole 10, Top Layer to Bottom Layer, 1 vias
v5: diameter 15/15 (per signal layer), hole 10, Top Layer to Bottom Layer, tented top, 1 vias

## Nets (pads, with @x,y where several pads share a name; then routed paths per layer and width w, separated by ;. In a path a pad name is that pad's centre, name@x,y a point inside that pad or via, vN(x,y) a via of type N, cw(c..) or ccw(c..) an arc to the next point about the centre after c; other vN are vias at no path point)
+3.3V_AN: "Power IN.2" C1.2 R14.1 U1.2 U2.5 U2.29 | length 2456.9
  Top Layer w10: C1.2@2099.5,1852.58 U2.29 ; U2.5@2197.61,2146.44 U2.5
  Top Layer w12: C1.2 2160.47,1803 2259.86,1803 2448.61,1991.75 v3(2448.61,2083) 2225.37,2083 2199.61,2108.75 ; 2197.61,2108.75 U2.5@2197.61,2146.44
  Top Layer w28: U1.2 2249.61,2610.39 v3(2453,2407) 2922.98,2407 2949,2380.98 3289.11,2380.98
  Top Layer w30: 2949,2380.98 2950,2379.98 R14.1
  Bottom Layer w28: v3(2448.61,2083) 2453,2087.39 v3(2453,2407)
AGND: "Power IN.1" "Thermistor GND Connections.1" "Thermistor GND Connections.2" "Thermistor GND Connections.3" "Thermistor GND Connections.4" "Thermistor GND Connections.5" "Thermistor GND Connections.6" "Thermistor GND Connections.7" "Thermistor GND Connections.8" "Thermistor GND Connections.9" "Thermistor GND Connections.10" "Thermistor GND Connections.11" "Thermistor GND Connections.12" "Thermistor GND Connections.13" "Thermistor GND Connections.14" "Thermistor GND Connections.15" "Thermistor GND Connections.16" "Thermistor GND Connections.17" "Thermistor GND Connections.18" "Thermistor GND Connections.19" "Thermistor GND Connections.20" "Thermistor GND Connections.21" "Thermistor GND Connections.22" C1.1 C2.1 C3.2 C4.1 C5.1 C6.1 C7.1 C8.1 C9.1 C10.1 C11.1 C12.1 C13.1 C14.1 C15.1 D1.1 P2.1 P2.2 P2.3 P2.4 P2.5 P2.6 P2.7 P2.8 P2.9 P2.10 P2.11 P2.12 P2.13 P2.14 P2.15 P2.16 P2.17 P2.18 P2.19 P2.20 P2.22 P2.51 P5.1 P5.2 P5.3 P5.4 P5.5 P5.6 P5.7 P5.8 P5.9 P5.10 P5.11 P5.12 P5.13 P5.14 P5.15 P5.16 P5.17 P5.18 P5.19 P5.20 P5.21 P5.22 R13.1 S1.1 S2.1 S3.1 S4.1 U1.1 U1.4 U1.8 U2.3 U2.6 U2.9 U2.10 U2.11 U2.12 U2.13 U2.14 U2.19 U2.20 U2.30 | length 1551
  Top Layer w10: C10.1 C10.1@1618.61,1750.5 ; v1(1887.61,2147.75) 1888.61,2147.75 1889.61,2148.75 v1@1891.61,2146.75 ; U2.20@1919.93,1922.75 1920.93,1923.75 U2.20 ; C7.1 C7.1@1925.61,1751.46 ; C6.1 C6.1@2027.61,1750.23 ; v1@2069.98,2103.39 v1(2070.61,2102.75) ; U2.30 2119.19,1902.22 2170.41,1851 C1.1
  Top Layer w12: U2.3 2237.3,2199.12
  Top Layer w15: v5(1514.61,1717.75) 1516.18,1719.32 C11.1 ; v2(1618.61,1718.75) C10.1@1618.61,1750.5 ; C9.1 1720.54,1719.82 v2(1720.61,1719.75) ; C8.1 1824.61,1748.86 v1(1824.61,1711.75) ; v1(1852.61,1957.75) 1854.61,1959.75 2107.61,1959.75 2119.19,1948.18 U2.30 ; v1(1925.61,1713.75) C7.1@1925.61,1751.46 ; v1(2027.61,1713.75) C6.1@2027.61,1750.23 ; v1(2127.61,1709.75) C5.1@2127.61,1742.41 ; v1(2143,2206) 2158.63,2206 2178.24,2186.38 U2.6 ; U1.4@2148,2666.42 U1.4 ; C4.1 2231.45,1718.91 2231.61,1718.75 v1(2231.61,1709.75) ; 2237.3,2199.12 v1(2267.18,2229) ; U1.1 2300.58,2669 v2(2376,2669) ; v1(2333.61,1714.75) C12.1@2333.61,1750.73 ; v1@2435.82,1714.96 C13.1 ; v1(2535.61,1714.75) 2538,1717.14 C14.1 ; v1@2640.18,1715.75 C15.1
  Top Layer w20: v4(1889.61,1922.75) U2.20@1919.93,1922.75 ; v1@1891.61,2146.75 1913.61,2146.75 ; 2028.61,2146.75 U2.13 U2.12 2069.98,2146.75 ; v1(2032.61,2392.75) C3.2 ; v1@2069.98,2103.39 2069.98,2146.75 ; 2110.61,2146.75 U2.10 U2.11 2069.98,2146.75 ; v1(2148,2594) U1.4@2148,2666.42 ; C2.1 v1(2300.61,2391.75) ; v1@2299.61,2392.75 U1.8 ; v1(2435.61,1714.75) v1@2435.82,1714.96
  Top Layer w28: v3(2950,2096) D1.1
  other v1: 2639.61,1715.75
DGND: R13.2 U2.35 | length 140
  Top Layer w10: U2.35 2217.61,1888.39 v1(2240,1866)
  Bottom Layer w15: 2351,1839 2356.61,1844.61 2356.61,1876.75 2354,1879.37 2354,1910
NetC3_1: C3.1 U1.5 | length 49.3
  Top Layer w25: C3.1@2149.61,2396.47 U1.5@2149.61,2445.75
NetC4_2: C4.2 R1.2 U2.28 | length 351.8
  Top Layer w10: U2.28 2079.82,1808.18 2116.25,1771.75 2142.61,1771.75 2163.61,1750.75 C4.2 2200.07,1748.5 R1.2
NetC5_2: C5.2 R2.2 U2.27 | length 280.4
  Top Layer w10: U2.27 2060.13,1768.23 2076.38,1751.99 C5.2@2087.72,1751.99 ; R2.2 C5.2@2093.43,1746.05 ; C5.2@2098.96,1750.75 2100.14,1750.75 C5.2@2099.43,1750.05
NetC6_2: C6.2 R3.2 U2.26 | length 280
  Top Layer w10: R3.2 1998.8,1749.91 C6.2 1997.96,1780.09 2040.45,1822.59 U2.26
NetC7_2: C7.2 R4.2 U2.25 | length 341.8
  Top Layer w10: R4.2 1895.77,1662.68 C7.2 1895.77,1778.91 1931.61,1814.75 1977.61,1814.75 2020.76,1857.9 U2.25
NetC8_2: C8.2 R5.2 U2.24 | length 417.6
  Top Layer w10: R5.2 1797.52,1746.82 C8.2 1797.54,1754.7 1797.54,1777.67 1851.61,1831.75 1967.61,1831.75 2001.08,1865.22 U2.24
NetC9_2: C9.2 R6.2 U2.23 | length 504.8
  Top Layer w10: C9.2 C9.2@1691.65,1750.75 ; R6.2 1691.65,1665.53 C9.2@1691.65,1750.75 ; U2.23 1981.39,1875.53 1955.61,1849.75 1759.61,1849.75 1686.61,1776.75 1686.61,1756.73 1692.59,1750.75 C9.2@1691.65,1750.75
NetC10_2: C10.2 R7.2 U2.22 | length 591.7
  Top Layer w10: C10.2 C10.2@1590.41,1750.75 ; R7.2 1583.61,1672.93 1583.61,1745.52 1595.65,1745.52 C10.2@1590.41,1750.75 ; U2.22@1961.61,1903.66 1961.61,1882.75 1945.61,1866.75 1680.61,1866.75 1590.41,1776.55 C10.2@1590.41,1750.75 ; U2.22@1961.63,1903.67 1961.63,1922.26 U2.22
NetC11_2: C11.2 R8.2 U2.21 | length 702.2
  Top Layer w10: C11.2 C11.2@1488.23,1750.75 ; R8.2 1484.61,1671.3 1484.61,1745.52 1493.46,1745.52 C11.2@1488.23,1750.75 ; C11.2@1488.23,1750.75 1493.46,1755.99 1482.61,1755.99 1482.61,1776.75 1589.61,1883.75 1933.61,1883.75 1942.01,1892.15 U2.21@1942.01,1903.8 ; U2.21@1942.02,1903.8 U2.21 U2.21@1942.01,1903.8
NetC12_2: C12.2 R9.2 U2.18 | length 1587.9
  Top Layer w10: U2.18@1942.34,2146.75 1942.34,2197.48 2059.86,2315 2462.37,2315 2650.61,2126.75 2650.61,1993.61 2568,1911 2412.86,1911 2304.5,1802.64 C12.2 2300.71,1746.96 R9.2
NetC13_2: C13.2 R10.2 U2.17 | length 1380.3
  Top Layer w10: U2.17 1961.71,2187.85 2069.86,2296 2437.37,2296 2615.61,2117.75 2615.61,2002 2561.61,1948 v1(2536,1948) ; R10.2 C13.2@2401.34,1745.52 ; C13.2@2402.68,1751.75 2402.68,1786.75 2485.07,1869.14 v1(2506,1869.14)
  Bottom Layer w15: v1(2506,1869.14) 2536,1899.14 v1(2536,1948)
NetC14_2: C14.2 R11.2 U2.16 | length 1220.8
  Top Layer w10: U2.16 1981.39,2184.53 2071.86,2275 2420.37,2275 2583.61,2111.75 v1(2583.61,2014) ; R11.2 2502.45,1660.77 C14.2@2502.45,1745.52 ; C14.2@2512.87,1750.75 2512.87,1802.25 v1(2583.61,1873)
  Bottom Layer w10: v1@2583.61,1874.75 v1(2583.61,2014)
  Bottom Layer w15: v1(2583.61,1873) v1@2583.61,1874.75
NetC15_2: C15.2 R12.2 U2.15 | length 1252.5
  Top Layer w10: U2.15 2001.08,2183 2073.08,2255 2397.37,2255 v1(2543.61,2108.75) ; R12.2 2604.63,1662.31 2604.63,1745.52 2609.87,1750.75 C15.2 2611.05,1785.18 2691.61,1865.75 2691.61,2016.75 v1(2692.61,2017.75)
  Bottom Layer w10: v1(2543.61,2108.75) 2543.61,2106.75 2545.61,2104.75 2605.61,2104.75 v1(2692.61,2017.75)
NetD1_2: D1.2 R14.2 | length 52.5
  Top Layer w30: D1.2 R14.2
NetP3_1: P3.1 R12.1 | length 525.7
  Top Layer w10: R12.1 R12.1@2607.61,1598.21
  Top Layer w25: P3.1@2364.61,1255.75 2493.61,1255.75 2607.61,1369.75 R12.1@2607.61,1598.21
NetP3_2: P3.2 R11.1 | length 506.5
  Top Layer w10: R11.1 R11.1@2504.61,1600.57
  Top Layer w25: v1(2503,1369) 2503,1598.96 R11.1@2504.61,1600.57
  Bottom Layer w25: P3.2@2364.61,1155.75 P3.2 2503,1297.14 v1(2503,1369)
NetP3_3: P3.3 R10.1 | length 504.1
  Top Layer w10: P3.3 P3.3@2264.61,1167.75
  Top Layer w25: P3.3@2264.61,1164.75 2313.61,1213.75 2313.61,1393.75 2401.34,1481.48 R10.1
NetP3_4: P3.4 R9.1 | length 362.4
  Top Layer w25: P3.4@2264.61,1255.75 2264.61,1461.75 2300.71,1497.84 R9.1
NetP3_5: P3.5 R1.1 | length 360.3
  Top Layer w25: P3.5@2164.61,1255.75 2195.61,1286.75 R1.1@2195.61,1603.21
NetP3_6: P3.6 R2.1 | length 472.9
  Top Layer w25: R2.1 2093.43,1529.93 2116.61,1506.75 2116.61,1203.75 P3.6@2164.61,1155.75
NetP3_7: P3.7 R3.1 | length 474.7
  Top Layer w25: R3.1 1998.8,1531.57 2008.77,1521.6 v1(2008.77,1438.23)
  Bottom Layer w25: v1(2008.77,1438.23) 2008.77,1211.6 P3.7@2064.61,1155.75
NetP3_8: P3.8 R4.1 | length 416.4
  Top Layer w25: R4.1 1898.16,1489.21 2064.61,1322.75 P3.8@2064.61,1255.75
NetP3_9: P3.9 R5.1 | length 416.7
  Top Layer w25: R5.1 1797.52,1500.84 1964.61,1333.75 P3.9@1964.61,1255.75
NetP3_10: P3.10 R6.1 | length 558.4
  Top Layer w25: R6.1 1696.89,1532.48 1915.61,1313.75 1915.61,1204.75 P3.10@1964.61,1155.75
NetP3_11: P3.11 R7.1 | length 563.8
  Top Layer w10: R7.1 R7.1@1596.61,1602.85 ; P3.11 P3.11@1864.61,1161.75
  Top Layer w25: v1(1594,1426.37) 1594,1600.23 R7.1@1596.61,1602.85
  Bottom Layer w25: v1(1594,1426.37) P3.11@1864.61,1155.75
NetP3_12: P3.12 R8.1 | length 618.3
  Top Layer w25: R8.1 1495.61,1423.39 1663.25,1255.75 P3.12@1864.61,1255.75
NetP6_1: "SPI Connector.1" "SPI Test Con.4" U2.34 | length 1842
  Top Layer w10: U2.34 v2@2197.93,2059.75
  Top Layer w15: 1015.8,2462.67 1015.8,2336.57 1065.74,2286.63 1422.63,2286.63 1585,2449 1625,2449 1625,2355 1760.46,2219.54 v1(1760.46,2060.75)
  Bottom Layer w15: v1(1760.46,2060.75) v2(2197.46,2060.75)
NetP6_2: "SPI Connector.2" "SPI Test Con.3" U2.33 | length 1843.5
  Top Layer w10: v1@1791.95,2025.75 v1(1791.95,2026.75) ; v2@2177.78,2027.75 v2(2177.78,2026.75) U2.33
  Top Layer w15: 1065.01,2462.67 1063.61,2461.26 1063.61,2347.37 1090.23,2320.75 1395.75,2320.75 1586,2511 1681,2511 1725,2467 1725,2449 1725,2382 1791.95,2315.05 v1(1791.95,2026.75)
  Bottom Layer w15: v1(1791.95,2026.75) 2165.61,2026.75 ; 2167.61,2026.75 v2(2177.78,2026.75)
NetP6_3: "SPI Connector.3" "SPI Test Con.2" U2.32 | length 1814.4
  Top Layer w10: v2(2158.09,2000.75) 2158.09,1996.75 2158.56,1996.29 U2.32 U2.32@2158.61,1922.4
  Top Layer w15: 1114.22,2462.67 1118.72,2458.16 1118.72,2375.75 1141.72,2352.75 1365.75,2352.75 1560,2547 1766,2547 1823.45,2489.55 v1(1823.45,2000.75) v1@1823.45,1995.75
  Bottom Layer w15: v1(1823.45,2000.75) v2(2158.09,2000.75)
NetP6_4: "SPI Connector.4" "SPI Test Con.1" U2.31 | length 1803.6
  Top Layer w10: v2(2138.41,1973.75) 2138.87,1973.29 U2.31
  Top Layer w15: 1163.43,2462.67 1163.43,2397.29 1170.97,2389.75 1343.75,2389.75 1541,2587 1839,2587 1930,2496 1930,2380 ; 1929.75,2380 1929.75,2339.93 1858.88,2269.07 1858.88,2032.44 1903.57,1987.75 2122.41,1987.75 v2@2138.41,1971.75
NetU2_7: U2.7 U2.8 | length 19.7
  Top Layer w12: U2.8 U2.7
VREF: C2.2 U1.6 U2.4 | length 314.2
  Top Layer w15: v1(2207,2344) C2.2@2207,2384.84 ; v1(2217,2228) 2217,2147.37 U2.4
  Top Layer w25: U1.6 2199.61,2392.22 C2.2 C2.2@2207,2384.84
  Bottom Layer w15: v1(2207,2344) 2217,2334 v1(2217,2228)
pads on no net: "SPI Test Con.MP1" "SPI Test Con.MP2" "Thermistor GND Connections.51" U1.3 U1.7 U2.1 U2.2 U2.36 U2.37 U2.38

## Polygon pours and split planes (outlines as drawn)
AGND on Bottom Layer "GND" (solid, remove dead copper, pour order 12): 235,2731 3560,2731 3560,134 235,134
AGND on Bottom Layer "GND" (solid, remove dead copper, pour order 13): 534,2420
DGND on Bottom Layer "DGND_L02_P010" (solid, remove dead copper, pour order 10): 2203.61,1969.75 2203.61,1818.75 2368.61,1818.75 2368.61,1969.75

## Silkscreen, mask and mechanical layers (free items; w line width, h text height)
Top Overlay:
  lines w4.92: 4154,1432 4154.19,1432.19
  text "CS" at 1032,2329 h60 r90
  text "CS" at 1645,2322 h60 r90
  text "MISO" at 1184,2253 h60 r90
  text "MOSI" at 1134,2252 h60 r90
  text "SCLK" at 1083,2251 h60 r90
  text "SCLK" at 1744,2251 h60 r90
  text "MOSI" at 1843,2251 h60 r90
  text "MISO" at 1948,2251 h60 r90
  text "Thermistor Common GND" at 1314.02,907.99 h40
  text "Will McKnight" at 2205,905 h40
  text "z" at 2207.02,752.99 h110
  text "REV 0.4" at 1839,750 h40
  text "3" at 1379.02,744.99 h110
Board Outline:
  the board outline again, w9.84
Board:
  the board outline again, w0.49